# Altium PCB PCB.PcbDoc
Units mm, origin at the board's own origin, x right, y up, seen from the top; angles counter-clockwise.
Board outline 26 x 26 mm, 4 copper layers (Top Layer, GND, Power, Bottom Layer), stack 1.586 mm thick; 26 components, 20 nets, 124 pads, 84 vias.
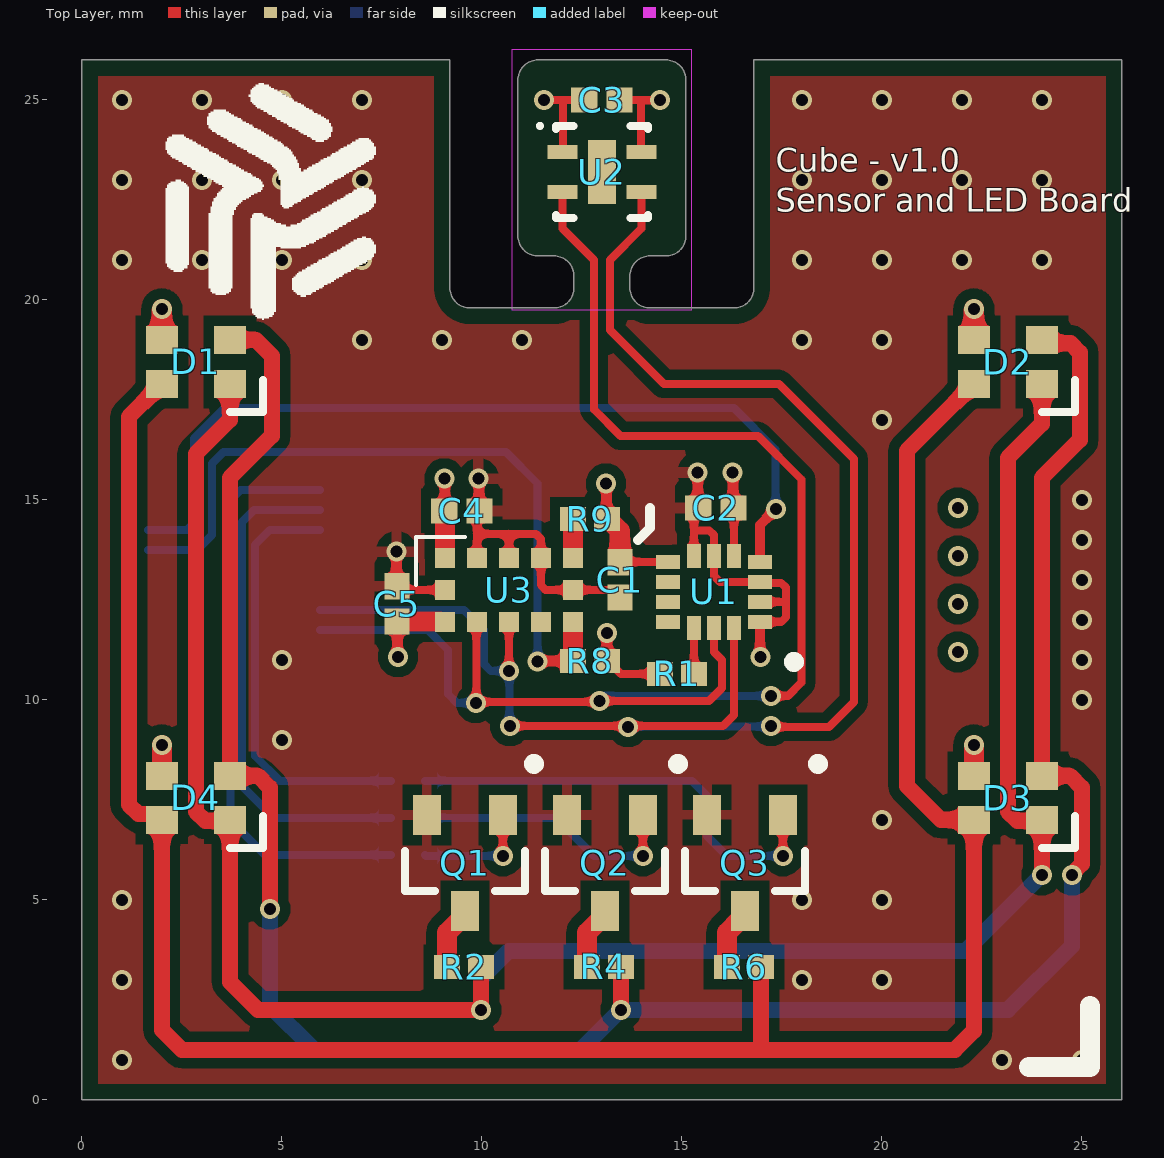
[diagram p0: Top Layer view]
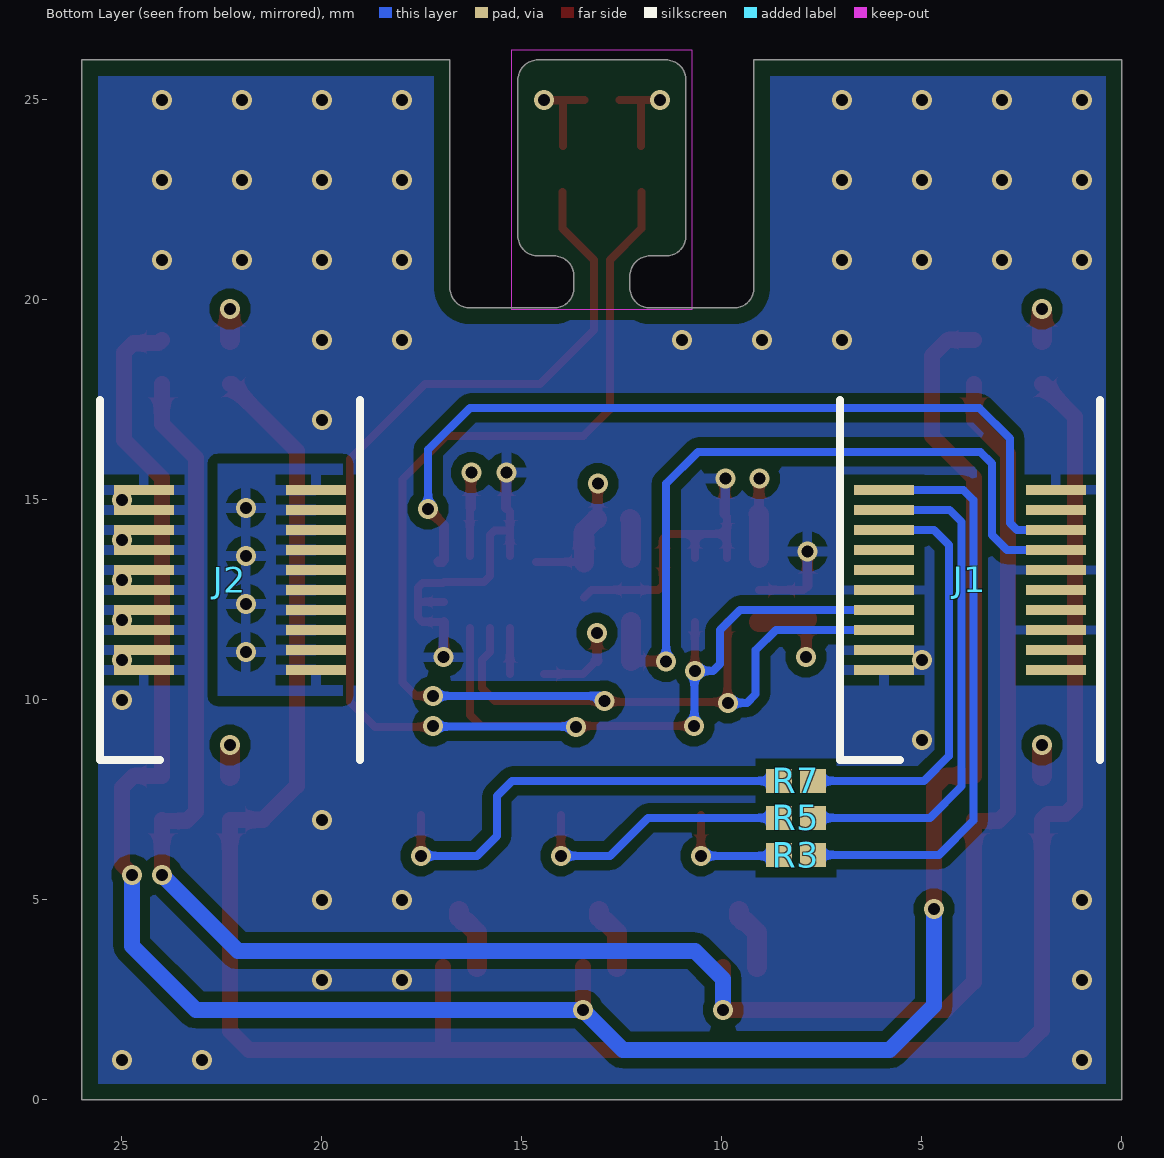
[diagram p1: Bottom Layer view, seen from below]
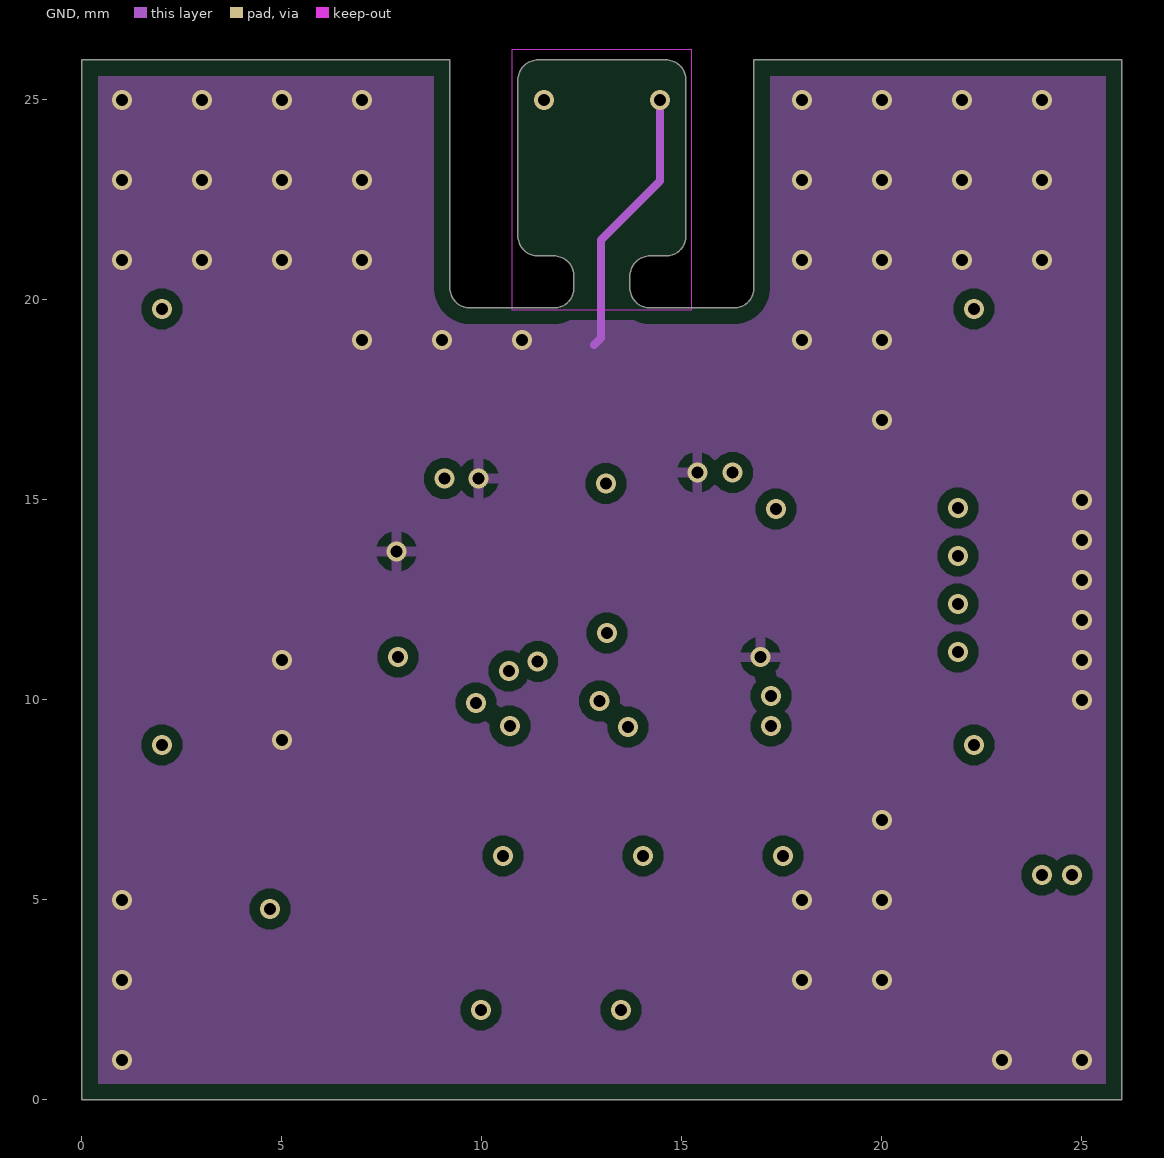
[diagram p2: GND]
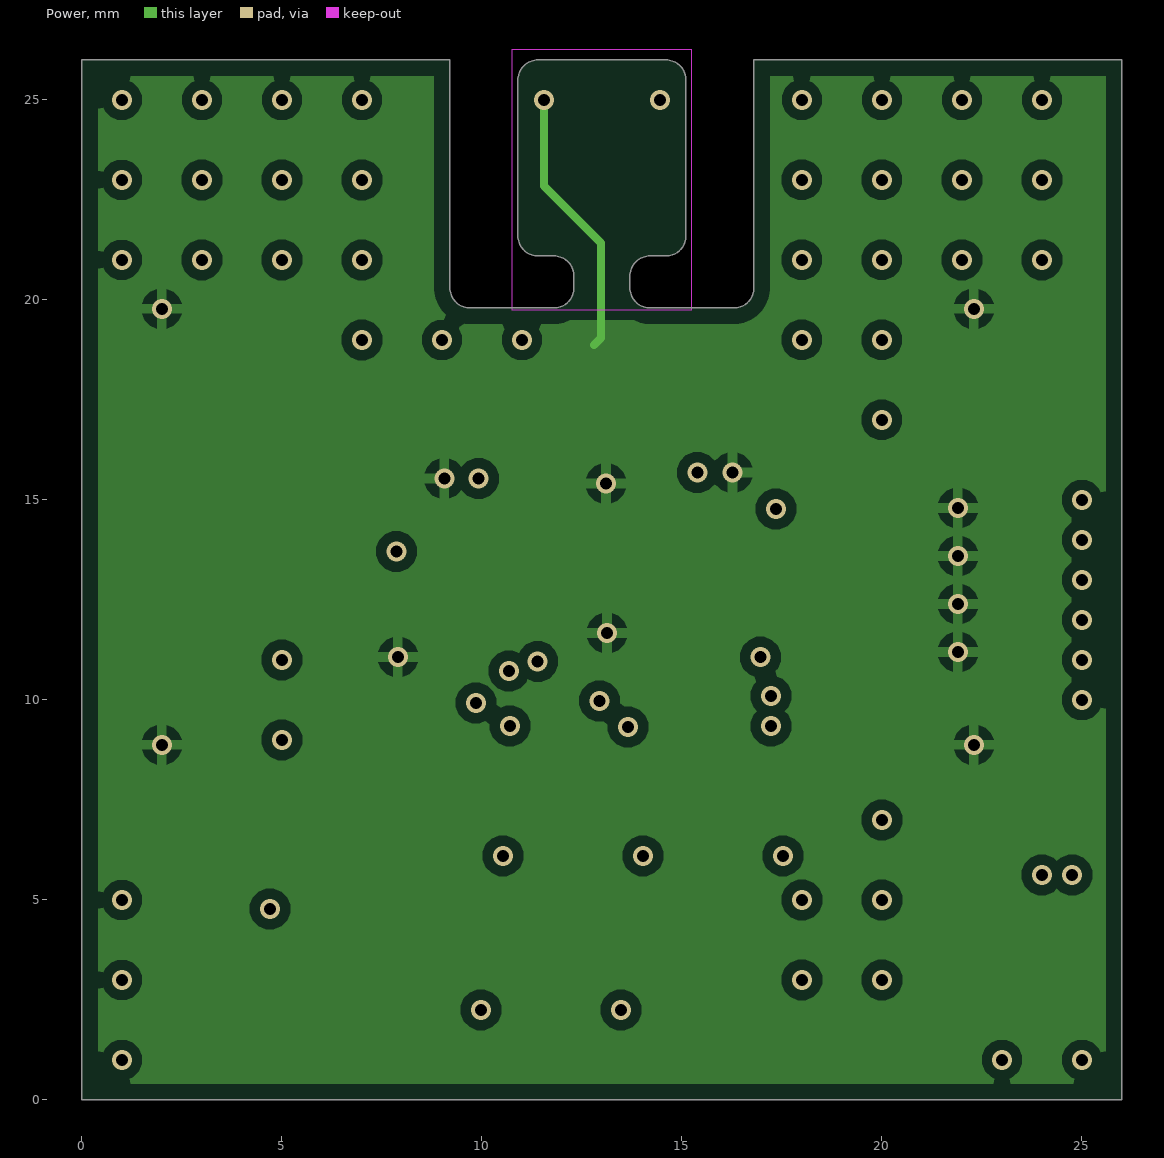
[diagram p3: Power]

## Layer stack, top to bottom
Top Solder: solder mask 0.0102, Solder Resist, Dk 3.5
Top Layer: signal copper 0.035
Dielectric 2: prepreg 0.2104, PP-006, Dk 4.6
GND: signal copper 0.0152
Dielectric 1: core 1.065, Core-025, Dk 4.6
Power: signal copper 0.0152
Dielectric 3: prepreg 0.2104, PP-006, Dk 4.6
Bottom Layer: signal copper 0.035
Bottom Solder: solder mask 0.0102, Solder Resist, Dk 3.5

## Board outline
9.7,19.8 cw(c9.7,20.3) 9.2,20.3 9.2,26 0,26 0,0 26,0 26,26 16.8,26 16.8,20.3 cw(c16.3,20.3) 16.3,19.8 14.2,19.8 cw(c14.2,20.3) 13.7,20.3 13.7,20.6 cw(c14.2,20.6) 14.2,21.1 14.6,21.1 ccw(c14.6,21.6) 15.1,21.6 15.1,25.5 ccw(c14.6,25.5) 14.6,26 11.4,26 ccw(c11.4,25.5) 10.9,25.5 10.9,21.6 ccw(c11.4,21.6) 11.4,21.1 11.8,21.1 cw(c11.8,20.6) 12.3,20.6 12.3,20.3 cw(c11.8,20.3) 11.8,19.8

## Design rules (kind name [scope] priority, off if disabled: settings)
BoardOutlineClearance [All] p1: gap=0.4 ignorepadtopadclearanceinfootprint=FALSE
Clearance [All] p1: gap=0.254 ignorepadtopadclearanceinfootprint=FALSE except(0: Arc-Hole Track-Hole SMDPad-Hole THPad-Hole Via-Hole Fill-Hole Poly-Hole Region-Hole Text-Hole; 0.09: Arc-Arc Arc-Track Track-Track; 0.127: SMDPad-SMDPad; 0.2: Arc-SMDPad Track-SMDPad; 0.33: Arc-THPad Track-THPad; 0.5: THPad-THPad)
PolygonConnect [All] p1: connectstyle=Relief reliefconductorwidth=0.254 reliefentries=4 polygonreliefangle="90 Angle" airgapwidth=0.254
RoutingVias [All] p1: holewidth=0.711 width=1.27 viastyle="Through Hole" minholewidth=0.2 minwidth=0.4 maxholewidth=0.711 maxwidth=1.27
SolderMaskExpansion [All] p1: expansion=0.102 istentingtop=FALSE
Width [All] p1: maxlimit=5 minlimit=0.09 preferedwidth=0.254 minimp=50.000000 maximp=50.000000 favimp=50.000000
30 further rules are at their usual default settings.

## Classes and differential pairs
component class "04 LED": D1 D2 D3 D4 Q1 Q2 Q3 R2 R3 R4 R5 R6 R7
component class "03 SENSORS": C1 C2 C3 C4 C5 R1 R8 R9 U1 U2 U3
component class "02 CONNECTION": J1 J2

## Components (designator, comment, footprint, x,y, rotation, side; value= is the part's Value field where it differs from the comment)
C1 "100nF/50V" CAPC1005X06N 13.45,13 r90 top
C2 "100nF/50V" CAPC1005X06N 15.85,14.8 r0 top
C3 "100nF/50V" CAPC1005X06N 13,25 r180 top
C4 "4.7uF/10V" CAPC1005X06N 9.5,14.725 r180 top
C5 "100nF/50V" CAPC1005X06N 7.875,12.4 r270 top
D1 "NH-B2020RGBA-HF" NH-B2020RGBA-HF 2,17.9 r0 top
D2 "NH-B2020RGBA-HF" NH-B2020RGBA-HF 22.3,17.9 r0 top
D3 "NH-B2020RGBA-HF" NH-B2020RGBA-HF 22.3,7 r0 top
D4 "NH-B2020RGBA-HF" NH-B2020RGBA-HF 2,7 r0 top
J1 "0529910208" 0529910208 5.55,10.75 r90 bottom
J2 "0529910208" 0529910208 24.05,10.75 r90 bottom
Q1 "MMS9013-H-TP" SOT95P237X110-3N 9.575,5.925 r270 top
Q2 "MMS9013-H-TP" SOT95P237X110-3N 13.075,5.925 r270 top
Q3 "MMS9013-H-TP" SOT95P237X110-3N 16.575,5.926 r270 top
R1 "10K/1%" RESC1005X04N 14.875,10.65 r0 top
R2 "47/1%" RESC1005X04N 9.55,3.326 r0 top
R3 "499/1%" RESC1005X04N 8.15,6.125 r180 bottom
R4 "47/1%" RESC1005X04N 13.05,3.325 r0 top
R5 "499/1%" RESC1005X04N 8.15,7.05 r180 bottom
R6 "47/1%" RESC1005X04N 16.55,3.325 r0 top
R7 "499/1%" RESC1005X04N 8.15,7.975 r180 bottom
R8 "10K/1%" RESC1005X04N 12.7,10.975 r180 top
R9 "10K/1%" RESC1005X04N 12.7,14.525 r180 top
U1 "LSM6DS3TR-C" PQFN50P300X250X86-14N 15.8,12.7 r180 top
U2 "SHTC3-10000" SON100P200X75_HS-5N 13,23.2 r0 top
U3 "VL53L0CXV0DH/1" VL53L0CXV0DH/1 12.275,13.55 r180 top

## Footprints (in the part's own frame and the unit in brackets; to place one, negate y for a bottom-side part, rotate by r counter-clockwise, add the part's x,y. Pads: shape width x height; smd on the part's side, far side on the other; paste and mask are expansions set on the pad)
0529910208 [mm]
  rect 0.25x1.5 smd: 1(0,-3.9) 2(0.5,-3.9) 3(1,-3.9) 4(1.5,-3.9) 5(2,-3.9) 6(2.5,-3.9) 7(3,-3.9) 8(3.5,-3.9) 9(4,-3.9) 10(4.5,-3.9) 11(0,0.4) 12(0.5,0.4) 13(1,0.4) 14(1.5,0.4) 15(2,0.4) 16(2.5,0.4) 17(3,0.4) 18(3.5,0.4) 19(4,0.4) 20(4.5,0.4)
  silkscreen extent -2.25,-5 6.75,1.5, body extent -2.15,-4.45 6.65,0.95, height 2.31
CAPC1005X06N [mm] "Chip Capacitor, 2-Leads, Body 1.00x0.50mm, IPC Medium Density"
  rect 0.66x0.62 smd: 1(-0.44,0) 2(0.44,0)
  body extent -0.53,-0.28 0.53,0.27, height 0.55
NH-B2020RGBA-HF [mm] "NH-B2020RGBA-HF"
  rect 0.8x0.7 smd: 1(1.7,0) 2(0,0) 3(0,1.1) 4(1.7,1.1)
  silkscreen extent 1.7,-0.7 2.52,0.1, body extent -0.2,-0.5 1.9,1.6, height 1
PQFN50P300X250X86-14N [mm] "PQFN, 14-Leads, Body 3.00x2.50mm, Pitch 0.50mm, IPC Medium Density"
  rect 0.6x0.35 smd: 1(-1.15,0.75) 2(-1.15,0.25) 3(-1.15,-0.25) 4(-1.15,-0.75) 8(1.15,-0.75) 9(1.15,-0.25) 10(1.15,0.25) 11(1.15,0.75)
  rect 0.35x0.6 smd: 5(-0.5,-0.9) 6(0,-0.9) 7(0.5,-0.9) 12(0.5,0.9) 13(0,0.9) 14(-0.5,0.9)
  silkscreen extent -2.13,1.63 -1.88,1.87, body extent -1.55,-1.3 1.55,1.3, height 0.86
RESC1005X04N [mm] "Chip Resistor, 2-Leads, Body 1.00x0.50mm, IPC Medium Density"
  rect 0.65x0.6 smd: 1(-0.425,0) 2(0.425,0)
  body extent -0.55,-0.3 0.55,0.3, height 0.4
SON100P200X75_HS-5N [mm] "SON, 4-Leads, Body 2.00x2.00mm, Pitch 1.00mm, Thermal Pad 1.60x0.70mm, IPC Medium Density"
  rect 0.75x0.35 smd: 1(-0.985,0.5) 2(-0.985,-0.5) 3(0.985,-0.5) 4(0.985,0.5)
  rect 0.7x1.6 smd: 5(0,0)
  silkscreen extent -1.6,-1.15 1.15,1.2, body extent -1,-1 1,1, height 0.75
SOT95P237X110-3N [mm] "SOT23, 3-Leads, Body 2.90x2.37mm, Pitch 0.95mm, IPC Medium Density"
  rect 1x0.7 smd: 1(-1.2,0.95) 2(-1.2,-0.95) 3(1.2,0)
  silkscreen extent -2.6,-1.5 0.7,1.85, body extent -0.7,-1.5 0.7,1.5, height 1.1
VL53L0CXV0DH/1 [mm] "VL53L0CXV0DH/1"
  rect 0.5x0.5 smd: 1(3.2,0) 2(2.4,0) 3(1.6,0) 4(0.8,0) 5(0,0) 6(0,0.8) 7(0,1.6) 8(0.8,1.6) 9(1.6,1.6) 10(2.4,1.6) 11(3.2,1.6) 12(3.2,0.8)
  silkscreen extent 2.7,-0.53 3.92,0.67, body extent -0.6,-0.4 3.8,2, height 1.02

## Part data
C1 C2 C3 C5: library part CL05B104KO5NNNC, "16V 100nF X7R ±10% 0402  Multilayer Ceramic Capacitors MLCC - SMD/SMT ROHS", manufacturer="Samsung Electro-Mechanics", assembler_number=C1525, datasheet=https://datasheet.lcsc.com/lcsc/1810191219_Samsung-Electro-Mechanics-CL05B104KO5NNNC_C1525.pdf, mfr_part_number=CL05B104KO5NNNC
C4: library part CL05A475MP5NRNC, "10V 4.7uF X5R ±20% 0402  Multilayer Ceramic Capacitors MLCC - SMD/SMT ROHS", manufacturer="Samsung Electro-Mechanics", assembler_number=C23733, datasheet=https://datasheet.lcsc.com/lcsc/1810191211_Samsung-Electro-Mechanics-CL05A475MP5NRNC_C23733.pdf, mfr_part_number=CL05A475MP5NRNC
D1 D2 D3 D4: "-30℃~+85℃ Common anode RGB 110° SMD,2.1x2.1mm  Light Emitting Diodes (LED) ROHS", manufacturer="Foshan NationStar Optoelectronics", assembler_number=C2874116, datasheet=https://datasheet.lcsc.com/lcsc/2108150330_Foshan-NationStar-Optoelectronics-NH-B2020RGBA-HF_C2874116.pdf, mfr_part_number=NH-B2020RGBA-HF
J1 J2: "CONN PLUG 20POS SMD GOLD", manufacturer=MOLEX, datasheet=https://www.molex.com/pdm_docs/sd/529910208_sd.pdf, mfr_part_number=0529910208
Q1 Q2 Q3: manufacturer="MCC(Micro Commercial Components)", assembler_number=C90160, datasheet=https://datasheet.lcsc.com/lcsc/1912112237_MCC-Micro-Commercial-Components-MMS9013-H-TP_C90160.pdf, mfr_part_number=MMS9013-H-TP
R1 R8 R9: library part 0402WGF1002TCE, "62.5mW Thick Film Resistors 50V ±100ppm/℃ ±1% -55℃~+155℃ 10kΩ 0402  Chip Resistor - Surface Mount ROHS", manufacturer="UNI-ROYAL(Uniroyal Elec)", assembler_number=C25744, datasheet=https://datasheet.lcsc.com/lcsc/2206010100_UNI-ROYAL-Uniroyal-Elec-0402WGF1002TCE_C25744.pdf, mfr_part_number=0402WGF1002TCE
R2 R4 R6: library part RCT0247RJLF, "62.5mW ±5% 47Ω 0402  Chip Resistor - Surface Mount ROHS", manufacturer="HKR(Hong Kong Resistors)", assembler_number=C174246, datasheet=https://datasheet.lcsc.com/lcsc/1810251713_HKR-Hong-Kong-Resistors-RCT0247RJLF_C174246.pdf, mfr_part_number=RCT0247RJLF
R3 R5 R7: library part RC0402FR-07499RL, "62.5mW Thick Film Resistors 50V ±100ppm/℃ ±1% -55℃~+155℃ 499Ω 0402  Chip Resistor - Surface Mount ROHS", manufacturer=YAGEO, assembler_number=C137970, datasheet=https://datasheet.lcsc.com/lcsc/1810241332_YAGEO-RC0402FR-07499RL_C137970.pdf, mfr_part_number=RC0402FR-07499RL
U1: "LGA-14L  Attitude Sensor/Gyroscope ROHS", manufacturer=STMicroelectronics, assembler_number=C967633, datasheet=https://datasheet.lcsc.com/lcsc/2102261805_STMicroelectronics-LSM6DS3TR-C_C967633.pdf, mfr_part_number=LSM6DS3TR-C
U2: "DFN  Temperature and Humidity Sensor ROHS", manufacturer=Sensirion, assembler_number=C2880044, datasheet=https://datasheet.lcsc.com/lcsc/2108150430_Sensirion-SHTC3-10000_C2880044.pdf, mfr_part_number=SHTC3-10000
U3: "4.4*2.4*1.0mm  Position Sensor ROHS", manufacturer=STMicroelectronics, assembler_number=C91199, datasheet=https://datasheet.lcsc.com/lcsc/1811101103_STMicroelectronics-VL53L0CXV0DH-1_C91199.pdf, mfr_part_number=VL53L0CXV0DH/1

## Via types
v1: diameter 0.5, hole 0.3, Top Layer to Bottom Layer, tented both sides, 84 vias

## Nets (pads, with @x,y where several pads share a name; then routed paths per layer and width w, separated by ;. In a path a pad name is that pad's centre, name@x,y a point inside that pad or via, vN(x,y) a via of type N, cw(c..) or ccw(c..) an arc to the next point about the centre after c; other vN are vias at no path point)
+3V3: C1.2 C2.2 C3.2 C4.2 C5.2 D1.3 D2.3 D3.3 D4.3 J2.1 J2.2 J2.3 J2.4 J2.5 J2.6 J2.7 J2.8 J2.9 J2.10 R1.1 R8.1 R9.1 U1.5 U1.8 U2.1 U3.1 U3.11 | length 23.8
  Top Layer w0.2: v1(11.55,25) 12.05,25 ; U2.1@12.025,23.85 12.025,24.975 12.05,25 ; C3.2 12.05,25 ; R8.1 13.15,10.975 13.475,10.65 R1.1 ; C1.2 13.46,13.45 U1.8 ; C2.2@16.278,14.805 16.3,14.782 U1.5
  Top Layer w0.254: v1(7.9,11.075) 7.888,11.087 7.888,11.955 C5.2@7.911,11.979 ; C4.2@9.072,14.655 v1@9.072,15.523 ; R8.1@13.113,10.98 13.155,10.98 13.125,11.009 v1(13.125,11.675) ; R9.1@13.113,14.53 v1@13.113,15.398 ; C2.2@16.278,14.805 v1@16.278,15.673
  Top Layer w0.5: D4.3 v1(1.999,8.876) ; D1.3 v1@2,19.775 ; C5.2@7.875,12.035 7.875,12.015 7.935,11.955 8.935,11.955 8.94,11.95 U3.11 ; U3.1 9.075,14.64 C4.2@9.085,14.65 ; R9.1 13.15,14.525 13.45,14.225 C1.2 ; D3.3 v1@22.3,8.875 ; D2.3 v1@22.3,19.775
  Power w0.2: v1(11.55,25) 11.55,22.85 12.975,21.425 12.975,19.05 12.8,18.875
  other v1: 22.299,8.876 21.9,11.2 21.9,12.4 21.9,13.6 21.9,14.8 13.1,15.41 9.06,15.535 16.265,15.685 1.999,19.776 22.299,19.776
GND: C1.1 C2.1 C3.1 C4.1 C5.1 J1.3 J1.6 J1.10 J1.11 J1.12 J1.15 J2.11 J2.12 J2.13 J2.14 J2.15 J2.16 J2.17 J2.18 J2.19 J2.20 Q1.2 Q2.2 Q3.2 U1.1 U1.2 U1.3 U1.6 U1.7 U2.4 U3.2 U3.3 U3.4 U3.6 U3.12 | length 27.4
  Top Layer w0.2: C5.1@7.863,12.845 7.957,12.75 U3.12 ; U3.2 9.875,14.15 ; C4.1@9.94,14.65 9.875,14.585 9.875,14.15 ; U3.3 10.675,14.15 ; C3.1 v1(14.45,25) 14.43,24.98 14.092,24.98 ; C1.1 13.26,12.75 11.592,12.75 11.475,12.867 11.475,14.025 11.35,14.15 10.675,14.15 ; U2.4@13.975,23.85 13.975,24.863 ; U1.7 15.3,14.25 ; C2.1@15.398,14.805 15.3,14.707 15.3,14.25 ; U1.1 17.483,11.95 17.6,12.067 17.6,12.384 ; U1.2 17.534,12.45 17.6,12.384 ; 9.875,14.15 10.675,14.15 ; 15.3,14.25 15.312,14.238 15.683,14.238 15.8,14.121 U1.6 15.8,13.1 15.95,12.95 U1.3 16.975,12.925 17.483,12.925 17.6,12.808 17.6,12.384
  Top Layer w0.254: C5.1@7.863,12.852 v1(7.863,13.712) ; C4.1@9.927,14.655 v1@9.927,15.523 ; C2.1@15.398,14.805 v1@15.398,15.673 ; v1@16.95,11.082 U1.1
  GND w0.2: 12.8,18.875 12.975,19.05 12.975,21.5 14.45,22.975 v1(14.45,25)
  other v1: 1,1 23.001,1.001 25,1 1,3 17.999,3.001 20,3 1,5 18.001,4.999 20.001,4.999 20.001,6.999 4.999,9.001 25,10 4.999,11.001 25,11 16.963,11.07 25,12 25,13 25,14 25,15 9.915,15.535 15.385,15.685 19.998,17.002 7,19 9,19 11,19 17.997,19.003 19.998,19.002 0.998,21.002 2.999,21.001 4.999,21.001 7,21 17.997,21.003 19.998,21.002 21.998,21.002 23.999,21.001 0.998,23.002 2.999,23.001 4.999,23.001 7,23 17.997,23.003 19.998,23.002 21.998,23.002 23.999,23.001 0.999,25.001 3,25 5.001,24.999 7.001,24.999 17.998,25.002 19.999,25.001 21.999,25.001 24,25
LED_BLUE_CAT: D1.2 D2.2 D3.2 D4.2 R6.2 | length 58
  Top Layer w0.4: D1.2 1.95,17.9 1.8,17.75 1.8,17.7 1.175,17.075 1.175,7.384 1.409,7.15 1.85,7.15 D4.2 2,1.75 2.5,1.25 16.95,1.25 ; R6.2 16.975,1.275 16.95,1.25 ; D2.2 22.25,17.9 22.1,17.75 22.1,17.7 20.625,16.225 20.625,7.85 21.475,7 D3.2 22.3,1.725 21.825,1.25 16.95,1.25
LED_GREEN_CAT: D1.4 D2.4 D3.4 D4.4 R4.2 | length 58.6
  Top Layer w0.4: D1.4 4.35,19 4.75,18.6 4.75,16.6 3.7,15.55 D4.4 4.407,8.1 4.7,7.807 v1(4.7,4.775) ; v1(13.475,2.25) R4.2 ; D2.4 24.083,18.917 24.716,18.917 24.95,18.683 24.95,16.5 24,15.55 D3.4 24.707,8.1 25,7.807 25,5.898 24.773,5.671 v1@24.773,5.644
  Bottom Layer w0.4: v1(4.7,4.775) 4.7,2.355 5.805,1.25 12.475,1.25 v1(13.475,2.25) 23.15,2.25 24.754,3.854 v1(24.754,5.625)
LED_RED_CAT: D1.1 D2.1 D3.1 D4.1 R2.2 | length 52.9
  Top Layer w0.4: D1.1 3.7,17 2.85,16.15 2.85,7.209 3.084,6.975 3.675,6.975 D4.1 3.7,2.95 4.399,2.251 v1(9.975,2.251) R2.2 ; v1(24,5.625) D3.1 23.975,6.975 23.384,6.975 23.15,7.209 23.15,16.05 24,16.9 D2.1
  Bottom Layer w0.4: v1(9.975,2.251) 9.975,3.026 10.674,3.725 22.1,3.725 v1(24,5.625)
NetJ1_7: J1.7 R8.2 U3.7 | length 18.4
  Top Layer w0.254: v1@11.407,10.975 R8.2
  Top Layer w0.5: R8.2 U3.7
  Bottom Layer w0.2: J1.7 2.875,13.75 3.25,14.125 3.25,15.91 3.54,16.2 10.6,16.2 11.395,15.405 11.395,14.545 v1(11.395,10.963)
NetJ1_8: J1.8 U1.4 | length 21.7
  Top Layer w0.254: U1.4@17.08,13.455 16.993,13.455 16.95,13.498 16.95,14.375 v1(17.35,14.775)
  Bottom Layer w0.2: J1.8 2.625,14.25 2.8,14.425 2.8,16.535 3.565,17.3 16.3,17.3 17.345,16.255 17.345,14.78 v1(17.35,14.775)
NetJ1_13: J1.13 U1.13 U2.2 U3.10 | length 37.2
  Top Layer w0.2: U3.10 9.863,11.938 9.863,9.938 v1(9.85,9.925) 9.879,9.954 12.918,9.954 v1(12.939,9.975) 15.674,9.975 16,10.301 16,10.999 15.8,11.199 U1.13 ; U2.2 12.015,21.786 12.8,21.001 12.8,17.265 13.465,16.6 16.9,16.6 17.985,15.515 17.985,10.435 17.65,10.1 v1(17.225,10.1)
  Bottom Layer w0.2: J1.13 8.65,11.75 9.157,11.243 9.157,10.143 9.375,9.925 v1(9.85,9.925) ; v1(12.939,9.975) 13.021,9.975 13.146,10.1 v1(17.225,10.1)
NetJ1_14: J1.14 U1.14 U2.3 U3.9 | length 39.6
  Top Layer w0.2: v1(10.675,10.725) U3.9 ; v1(10.7,9.35) 16.025,9.35 16.3,9.625 U1.14 ; U2.3 13.985,21.786 13.2,21.001 13.2,19.25 14.55,17.9 17.425,17.9 19.3,16.025 19.3,9.95 18.675,9.325 17.246,9.325 v1(17.225,9.346)
  Bottom Layer w0.2: J1.14 9.55,12.25 10.05,11.75 10.05,10.896 10.221,10.725 v1(10.675,10.725) 10.687,10.713 10.687,9.362 v1(10.7,9.35) ; v1(13.65,9.325) 13.661,9.336 17.214,9.336 v1(17.225,9.346)
NetJ1_18: J1.18 R7.2 | length 10.7
  Bottom Layer w0.2: J1.18 4.697,14.25 4.322,13.875 4.322,8.603 4.95,7.975 R7.2
NetJ1_19: J1.19 R5.2 | length 12.7
  Bottom Layer w0.2: J1.19 4.305,14.75 4.005,14.45 4.005,7.845 4.8,7.05 R5.2
NetJ1_20: J1.20 R3.2 | length 14.7
  Bottom Layer w0.2: J1.20 3.965,15.25 3.715,15 3.715,6.985 4.575,6.125 R3.2
NetQ1_1: Q1.1 R3.1 | length 3
  Top Layer w0.2: v1(10.525,6.101) Q1.1
  Bottom Layer w0.2: R3.1 8.599,6.101 v1(10.525,6.101)
NetQ1_3: Q1.3 R2.1 | length 1.6
  Top Layer w0.5: R2.1 9.125,4.182 9.418,4.475 9.475,4.475 9.575,4.575 Q1.3
NetQ2_1: Q2.1 R5.1 | length 6.9
  Top Layer w0.2: v1(14.025,6.101) Q2.1
  Bottom Layer w0.2: R5.1 11.85,7.05 12.799,6.101 v1(14.025,6.101)
NetQ2_3: Q2.3 R4.1 | length 1.6
  Top Layer w0.5: R4.1 12.625,4.182 12.918,4.475 12.975,4.475 13.075,4.575 Q2.3
NetQ3_1: Q3.1 R7.1 | length 11.3
  Top Layer w0.2: v1(17.525,6.101) Q3.1
  Bottom Layer w0.2: R7.1 15.25,7.975 15.625,7.6 15.625,6.6 16.124,6.101 v1(17.525,6.101)
NetQ3_3: Q3.3 R6.1 | length 1.6
  Top Layer w0.5: R6.1 16.125,4.183 16.418,4.476 16.475,4.476 16.575,4.576 Q3.3
NetR1_2: R1.2 U1.12 | length 1.2
  Top Layer w0.2: R1.2 U1.12
NetR9_2: R9.2 U3.5 | length 1
  Top Layer w0.5: U3.5 12.275,14.5 R9.2@12.3,14.525
pads on no net: J1.1 J1.2 J1.4 J1.5 J1.9 J1.16 J1.17 U1.9 U1.10 U1.11 U2.5 U3.8

## Polygon pours and split planes (outlines as drawn)
GND on GND "GND_L02_P000" (solid, pour order 0): 0,26 26,26 26,0 0,0
GND on Top Layer "GND_L01_P001" (solid, pour order 1): 0,26 26,26 26,0 0,0
+3V3 on Power "+3V3_L03_P002" (solid, pour order 2): 0,26 26,26 26,0 0,0
+3V3 on Bottom Layer "+3V3_L04_P004" (solid, pour order 4): 19.475,15.9 22.6,15.9 22.6,10.1 19.475,10.1
GND on Bottom Layer "GND_L04_P005" (solid, pour order 5): 0,26 26,26 26,0 0,0

## Keep-outs
Top Layer:
  rectangle: 10.75,19.75 15.25,26.25
GND:
  rectangle: 10.75,19.75 15.25,26.25
Power:
  rectangle: 10.75,19.75 15.25,26.25
Bottom Layer:
  rectangle: 10.75,19.75 15.25,26.25

## Silkscreen, mask and mechanical layers (free items; w line width, h text height)
Top Overlay:
  drawing of 10 lines, arcs and shapes, not listed
  text "Cube - v1.0 / Sensor and LED Board" at 17.344,22 h1
Dimensions:
  lines w0.254: 11.8,19.8 ccw(c11.8,20.3) 12.3,20.3 12.3,20.6 ccw(c11.8,20.6) 11.8,21.1 ; 11.875,19.8 9.7,19.8 cw(c9.7,20.3) 9.2,20.3 9.2,26 0,26 0,0 26,0 26,26 16.8,26 16.8,20.3 cw(c16.3,20.3) 16.3,19.8 14.125,19.8 ; 11.875,21.1 11.4,21.1 cw(c11.4,21.6) 10.9,21.6 10.9,25.5 cw(c11.4,25.5) 11.4,26 14.6,26 cw(c14.6,25.5) 15.1,25.5 15.1,21.6 cw(c14.6,21.6) 14.6,21.1 14.125,21.1 ; 14.2,19.8 cw(c14.2,20.3) 13.7,20.3 13.7,20.6 cw(c14.2,20.6) 14.2,21.1